# Altium PCB 2016-02-19_06-56-41.PcbDoc
Units mil, origin at the board's own origin, x right, y up, seen from the top; angles counter-clockwise.
Board outline 1950 x 2950 mil, 4 copper layers (Top Layer, MidLayer1, MidLayer2, Bottom Layer); 24 components, 14 nets, 57 pads, 106 vias.
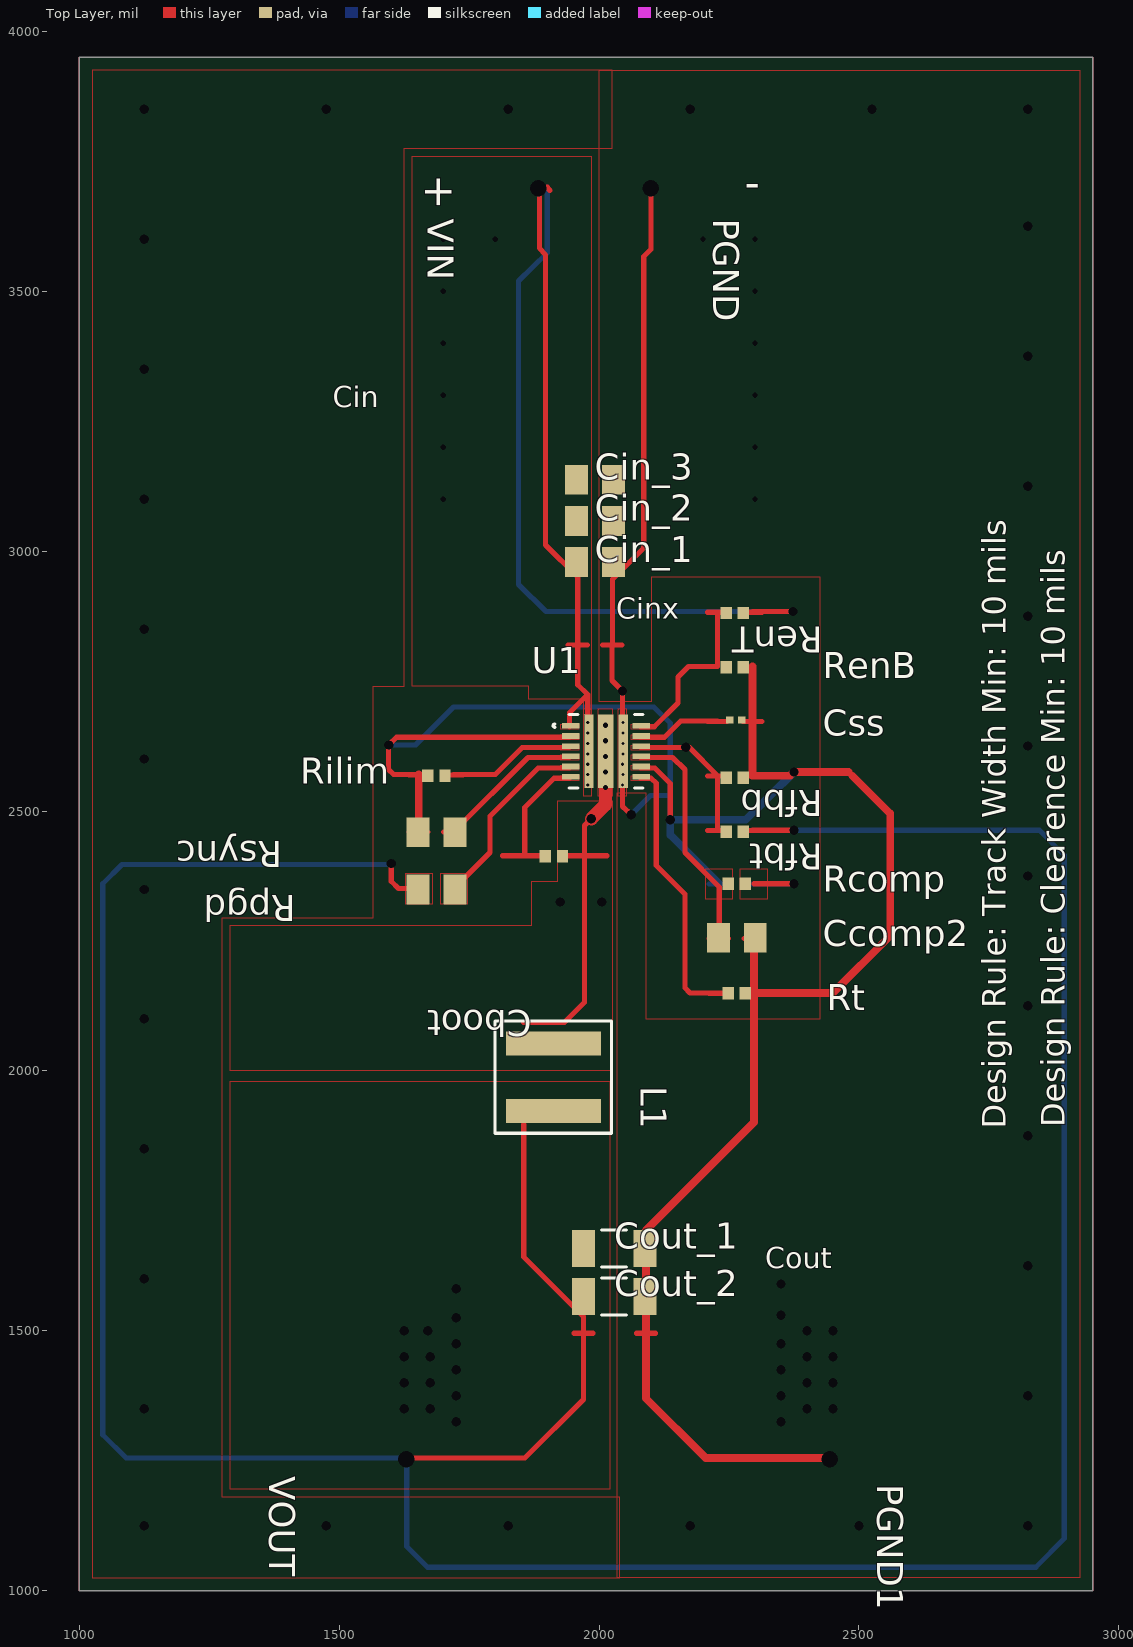
[diagram p0: Top Layer view]
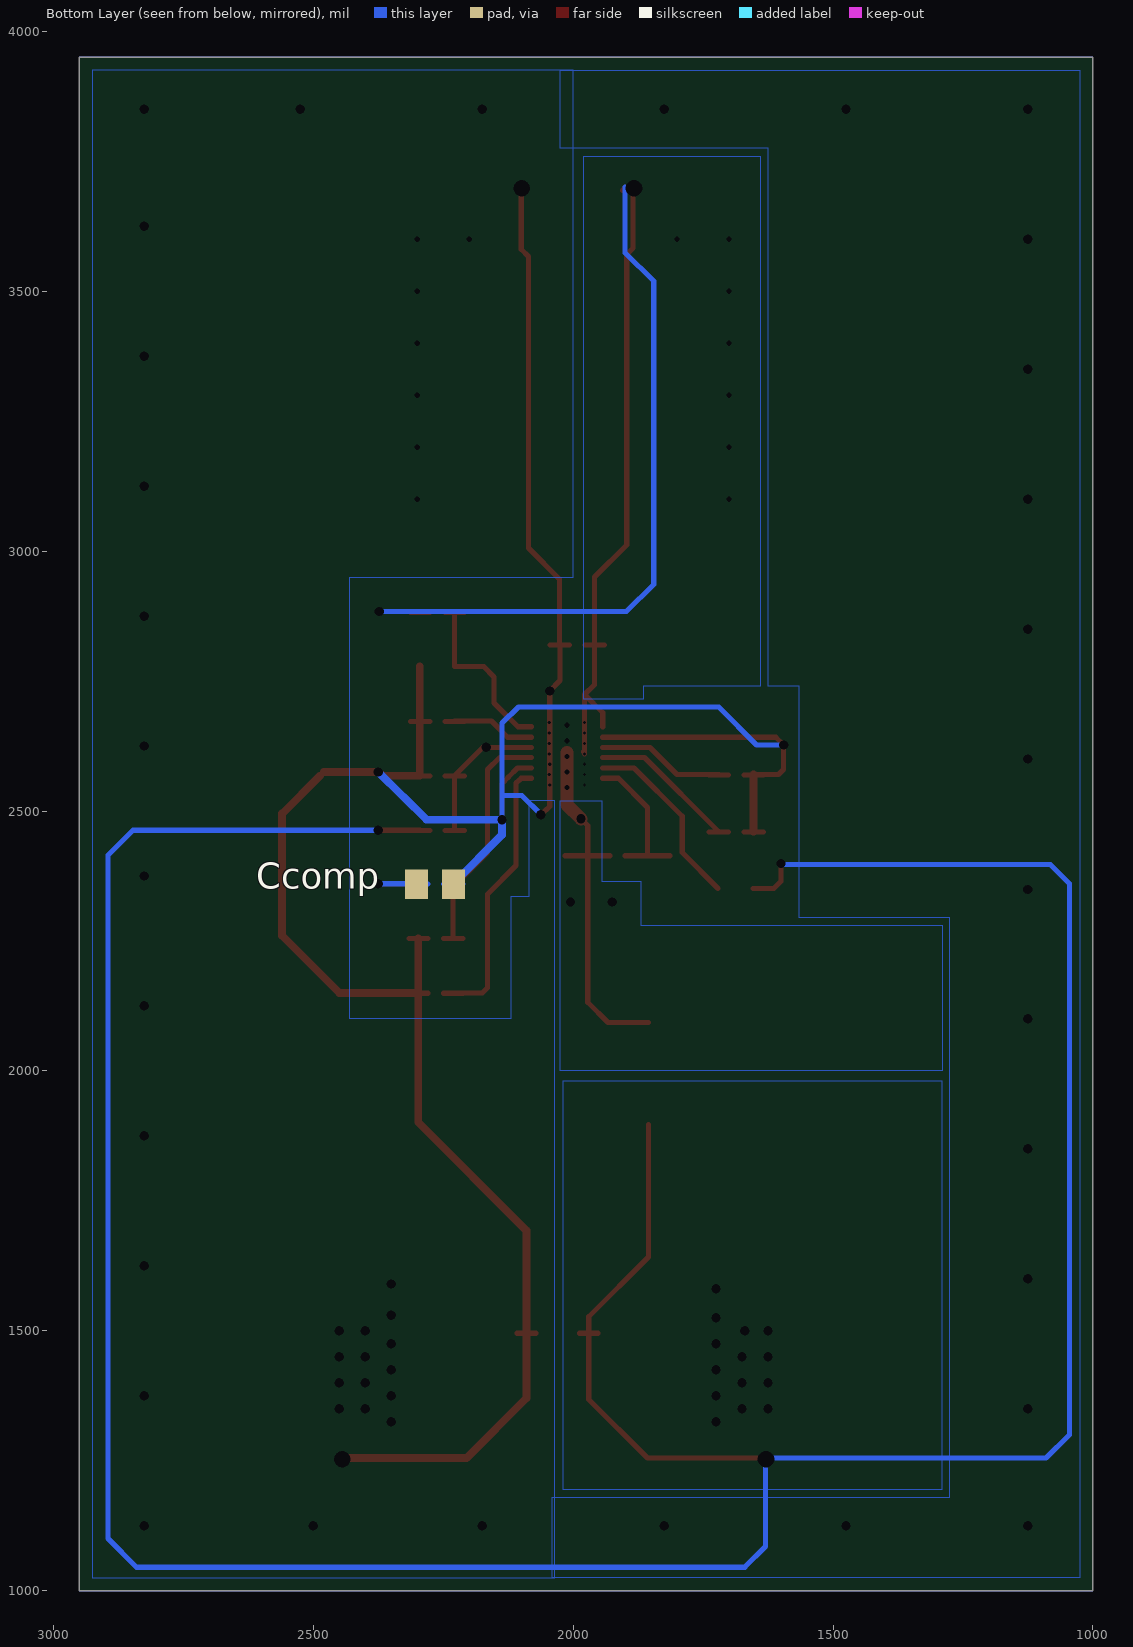
[diagram p1: Bottom Layer view, seen from below]

## Layer stack, top to bottom
Top Layer: signal copper 1.4
Dielectric: core 12.6, FR-4, Dk 4.8
MidLayer1: signal copper 1.4
Dielectric: prepreg 12.6, FR-4, Dk 4.8
MidLayer2: signal copper 1.4
Dielectric: core 12.6, FR-4, Dk 4.8
Bottom Layer: signal copper 1.4

## Board outline
1000,1000 2950,1000 2950,3950 1000,3950

## Design rules (kind name [scope] priority, off if disabled: settings)
PlaneConnect [All] p0: scope1count=1 scope1_0_kind=Board scope1_0_value=Board scope2count=1 scope2_0_kind=Board scope2_0_value=Board commentlength=0 planeconnectstyle=Direct reliefexpansion=20 reliefentries=4 reliefconductorwidth=10 reliefairgap=10
PlaneConnect [All] p1: planeconnectstyle=Direct reliefexpansion=20 reliefentries=4 reliefconductorwidth=10 reliefairgap=10
PolygonConnect [All] p0: scope1count=1 scope1_0_kind=Board scope1_0_value=Board scope2count=1 scope2_0_kind=Board scope2_0_value=Board commentlength=0 connectstyle=Direct reliefconductorwidth=10 reliefentries=4 polygonreliefangle="90 Angle"
PolygonConnect [All] p1: connectstyle=Direct reliefconductorwidth=10 reliefentries=4 polygonreliefangle="90 Angle"

## Components (designator, comment, footprint, x,y, rotation, side; value= is the part's Value field where it differs from the comment)
Cboot "" 0402 1913,2413 r180 top
Ccomp "" 0805#1 2266,2359 r0 bottom
Ccomp2 "" 0805#2 2265,2256 r0 top
Cin_1 "" 0805#2 1992,2979 r0 top
Cin_2 "" 0805#2 1992,3058 r0 top
Cin_3 "" 0805#2 1992,3137 r0 top
Cout_1 "" 1206_190 2029,1658 r0 top
Cout_2 "" 1206_190 2029,1566 r0 top
Css "" 0201 2263,2675 r0 top
L1 "" XAL5030 1912,1988 r270 top
PGND "" TP-1502 2099,3698 r270 top
PGND1 "" TP-1502 2444,1253 r270 top
Rcomp "" 0402 2265,2360 r0 top
RenB "" 0402 2261,2777 r0 top
RenT "" 0402 2261,2881 r180 top
Rfbb "" 0402 2261,2564 r180 top
Rfbt "" 0402 2261,2460 r180 top
Rilim "" 0402 1687,2568 r0 top
Rpgd "" 0805#2 1687,2349 r180 top
Rsync "" 0805#2 1687,2459 r180 top
Rt "" 0402 2265,2149 r0 top
U1 "" R-PVQFN-N15 2013,2615 r0 top
VIN "" TP-1502 1883,3698 r270 top
VOUT "" TP-1502 1629,1253 r270 top

## Footprints (in the part's own frame and the unit in brackets; to place one, negate y for a bottom-side part, rotate by r counter-clockwise, add the part's x,y. Pads: shape width x height; smd on the part's side, far side on the other; paste and mask are expansions set on the pad)
0201 [mil]
  rect 14x13 smd: 1(-11.5,0) 2(11.5,0)
0402 [mil]
  rect 22x24 smd: 1(-16.5,0) 2(16.5,0)
0805#1 [mil]
  rect 44x57 smd: 1(35.5,0) 2(-35.5,0)
0805#2 [mil]
  rect 44x57 smd: 1(-35.5,0) 2(35.5,0)
1206_190 [mil]
  rect 44x71 smd: 1(-59,0) 2(59,0)
  silkscreen extent -24,-36 24,36
R-PVQFN-N15 [mm]
  rect 0.85x0.28 smd: 1(-1.725,1.25) 2(-1.725,0.75) 3(-1.725,0.25) 4(-1.725,-0.25) 5(-1.725,-0.75) 6(-1.725,-1.25) 10(1.725,-1.25) 11(1.725,-0.75) 12(1.725,-0.25) 13(1.725,0.25) 14(1.725,0.75) 15(1.725,1.25)
  rect 0.45x3.6 smd: 7(-0.82,0) 9(0.85,0)
  rect 0.75x3.6 smd: 8(0,0)
  silkscreen extent -2.58,-1.8 1.8,1.8
TP-1502 [mil]
  round 0 hole 32: 1(0,0)
XAL5030 [mil]
  rect 46x183 smd: 1(-65,0) 2(65,0)
  silkscreen extent -108,-112 108,112

## Via types
v1: diameter 0, hole 18, Top Layer to Bottom Layer, 73 vias
v2: diameter 0, hole 10, Top Layer to Bottom Layer, 19 vias
v3: diameter 0, hole 6, Top Layer to Bottom Layer, 14 vias

## Nets (pads, with @x,y where several pads share a name; then routed paths per layer and width w, separated by ;. In a path a pad name is that pad's centre, name@x,y a point inside that pad or via, vN(x,y) a via of type N, cw(c..) or ccw(c..) an arc to the next point about the centre after c; other vN are vias at no path point)
0: Ccomp2.2 Ccomp.2 Cin_1.2 Cin_2.2 Cin_3.2 Cout_1.2 Cout_2.2 Css.2 PGND1.1 PGND.1 RenB.2 Rfbb.1 Rilim.1 Rsync.2 Rt.2 U1.2 U1.9 U1.11 | length 6014.4
  Top Layer w10: Rsync.2@1634,2459.5 Rsync.2@1671,2459.5 ; 1634,2569.5 Rilim.1@1671,2569.5 ; 1653,2570 1605,2570 1595,2580 v1(1595,2627) 1610,2642 U1.2@1943,2642 ; 2007,2819.5 2044,2819.5 ; v1(2062,2493) 2045,2509 v3(2045,2550) 2045,2610 2045,2613 v1(2045,2731) 2025,2751 2025,2818 2026,2820 2026,2946 2086,3006 2086,3272 2086,3567 2100,3581 2100,3700 ; 2072,1495 2108,1495 ; U1.11@2080,2583 2107,2583 2125,2565 2137,2553 v1(2137,2483) ; Rfbb.1@2276,2567.5 2313,2567.5 ; Css.2@2276,2672.5 2313,2672.5 ; Rt.2@2279,2149.5 2316,2149.5 ; Ccomp2.2@2279,2254.5 Ccomp2.2@2316,2254.5
  Top Layer w15: Rsync.2@1653,2460 1653,2570 ; 2295,2778 2295,2673 2295,2568 2367,2568 v1(2375,2575) 2480,2575 ; Ccomp2.2@2298,2255 2298,2150 ; 2445,1255 2205,1255 2090,1370 2090,1495 2090,1693 2298,1901 2298,2150 ; 2487,2568 2560,2495 2560,2260 2450,2150 2298,2150
  Bottom Layer w10: v1(1595,2627) 1647,2627 1720,2700 2105,2700 2137,2669 2137,2530 ; v1(2062,2493) 2099,2530 2137,2530 ; v1(2137,2483) 2137,2530 ; Ccomp.2@2212,2359.5 Ccomp.2@2249,2359.5
  Bottom Layer w15: Ccomp.2@2231,2360 2137,2454 v1(2137,2483) 2282,2483 v1(2375,2575)
  other v1: 1125,1125 1475,1125 1825,1125 2175,1125 2500,1125 2825,1125 2350,1325 1125,1350 2400,1350 2450,1350 2350,1375 2825,1375 2400,1400 2450,1400 2350,1425 2400,1450 2450,1450 2350,1475 2400,1500 2450,1500 2350,1530 2350,1590 1125,1600 2825,1625 1125,1850 2825,1875 1125,2100 2825,2125 1125,2349 2825,2375 1125,2600 2825,2625 1125,2850 2825,2875 1125,3100 2825,3125 1125,3350 2825,3375 1125,3600 2825,3625 1125,3850 1475,3850 1825,3850 2175,3850 2525,3850 2825,3850
  other v2: 2300,3100 2300,3200 2300,3300 2300,3400 2300,3500 2200,3600 2300,3600
  other v3: 2046,2570 2045,2590 2046,2610 2046,2630 2046,2650 2046,2670
1: Rilim.2 U1.3 | length 281.5
  Top Layer w10: Rilim.2@1701,2569.5 1738,2569.5 ; 1720,2570 1800,2570 1852,2622 U1.3@1943,2622
2: RenT.2 U1.15 | length 367.3
  Top Layer w10: U1.15@2080,2662 2106,2662 2152,2708 2152,2758 2172,2778 2228,2778 2228,2883 ; 2209,2882.5 RenT.2@2246,2882.5
3: Css.1 U1.14 | length 197.8
  Top Layer w10: U1.14@2080,2642 2126,2642 2157,2673 2228,2673 ; 2209,2672.5 Css.1@2246,2672.5
4: Cin_1.1 Cin_2.1 Cin_3.1 RenT.1 U1.1 U1.7 VIN.1 | length 2705.1
  Top Layer w10: 1885,3700 1885,3583 1897,3570 1897,3272 1897,3012 1959,2950 1959,2820 1959,2743 1978,2724 ; 1900,3700 1905,3694 ; 1940,2819.5 1977,2819.5 ; U1.1@1943,2662 1943,2689 1978,2724 ; v3(1978,2610) 1978,2612 U1.7@1978,2613 ; U1.7@1980,2614 U1.7@1978,2613 ; RenT.1@2276,2882.5 2313,2882.5 ; 2295,2884 v1(2373,2884) ; U1.7@1978,2613 v3(1978,2630) v3(1978,2650) v3(1978,2670) 1978,2724
  Bottom Layer w10: 1900,3700 1900,3574 1845,3520 1845,2936 1898,2884 v1(2373,2884) ; 2373,2885 2375,2885
  other v2: 1700,3100 1700,3200 1700,3300 1700,3400 1700,3500 1700,3600 1800,3600
  other v3: 1978,2550 1978,2570 1978,2590
5: Rt.1 U1.10 | length 557.4
  Top Layer w10: U1.10@2080,2563 2100,2563 2110,2554 2110,2395 2165,2340 2165,2160 2175,2150 2231,2150 ; 2212,2149.5 Rt.1@2249,2149.5
6: Cboot.1 L1.1 U1.8 | length 716.7
  Top Layer w10: 1855,2093 1933,2093 1972,2132 1972,2415 1972,2472 v1(1985,2485) ; Cboot.1@1929,2414 2015,2414
  Top Layer w25: v1(1985,2485) 2012,2512 U1.8@2012,2613
  other v1: 1925,2325 2005,2325
  other v2: 2012,2545 2012,2575 2012,2605 2012,2635 2012,2665
7: Ccomp2.1 Rcomp.1 U1.12 | length 483.6
  Top Layer w10: U1.12@2080,2603 2141,2603 2165,2580 2165,2420 2231,2354 Ccomp2.1@2231,2255 ; Ccomp2.1@2212,2254.5 Ccomp2.1@2249,2254.5
8: RenB.1 Rfbb.2 Rfbt.2 U1.13 | length 347.4
  Top Layer w10: U1.13@2080,2622 2164,2622 2167,2620 2170,2620 ; 2173,2623 2228,2568 2228,2463 ; 2209,2462.5 Rfbt.2@2246,2462.5 ; 2209,2567.5 Rfbb.2@2246,2567.5
  other v1: 2167,2623
9: Ccomp.1 Rcomp.2 | length 191
  Top Layer w10: 2298,2360 v1(2375,2360)
  Bottom Layer w10: 2279,2359.5 Ccomp.1@2316,2359.5 ; Ccomp.1@2298,2360 v1(2375,2360)
10: Cout_1.1 Cout_2.1 L1.2 Rfbt.1 Rpgd.2 VOUT.1 | length 6773.4
  Top Layer w10: v1(1600,2399) 1600,2398 1600,2365 1614,2351 Rpgd.2@1654,2351 ; 1630,1255 1857,1255 1970,1368 1970,1495 1970,1527 1855,1642 1855,1897 ; 1952,1495 1988,1495 ; Rfbt.1@2276,2462.5 2313,2462.5 ; 2295,2463 v1(2375,2463)
  Bottom Layer w10: 1600,2397 1082,2397 1045,2360 1045,1300 1090,1255 1630,1255 1630,1085 1670,1045 2840,1045 2895,1100 2895,2415 2847,2463 v1(2375,2463)
  other v1: 1725,1325 1625,1350 1675,1350 1725,1375 1625,1400 1675,1400 1725,1425 1625,1450 1675,1450 1725,1475 1625,1500 1670,1500 1725,1525 1725,1581
11: Cboot.2 U1.6 | length 287.2
  Top Layer w10: 1814,2414 Cboot.2@1900,2414 ; 1857,2415 1857,2507 1913,2563 U1.6@1943,2563
14: Rsync.1 U1.4 | length 319.2
  Top Layer w10: Rsync.1@1701,2459.5 Rsync.1@1738,2459.5 ; Rsync.1@1720,2460 1863,2603 U1.4@1943,2603
17: Rpgd.1 U1.5 | length 359.1
  Top Layer w10: Rpgd.1@1721,2351 1790,2420 1790,2490 1883,2583 U1.5@1943,2583

## Polygon pours and split planes (outlines as drawn)
7 on Top Layer " " (solid, pour order 0): 2205,2330 2205,2389 2256,2389 2256,2330
9 on Top Layer " " (solid, pour order 1): 2272,2330 2272,2389 2323,2389 2323,2330
10 on Top Layer " " (solid, pour order 2): 1628,2321 1628,2380 1679,2380 1679,2321
17 on Top Layer " " (solid, pour order 3): 1695,2321 1695,2380 1746,2380 1746,2321
2 on Top Layer " " (solid, pour order 4): 2062,2657 2062,2667 2097,2667 2097,2657
3 on Top Layer " " (solid, pour order 5): 2062,2637 2062,2647 2097,2647 2097,2637
8 on Top Layer " " (solid, pour order 6): 2062,2617 2062,2627 2097,2627 2097,2617
7 on Top Layer " " (solid, pour order 7): 2062,2598 2062,2608 2097,2608 2097,2598
5 on Top Layer " " (solid, pour order 8): 2062,2558 2062,2568 2097,2568 2097,2558
6 on Top Layer " " (solid, pour order 9): 1998,2528 1998,2697 2025,2697 2025,2528
4 on Top Layer " " (solid, pour order 10): 1970,2528 1970,2697 1985,2697 1985,2528
11 on Top Layer " " (solid, pour order 11): 1926,2558 1926,2568 1961,2568 1961,2558
17 on Top Layer " " (solid, pour order 12): 1926,2578 1926,2588 1961,2588 1961,2578
14 on Top Layer " " (solid, pour order 13): 1926,2598 1926,2608 1961,2608 1961,2598
1 on Top Layer " " (solid, pour order 14): 1926,2617 1926,2627 1961,2627 1961,2617
4 on Top Layer " " (solid, pour order 15): 1926,2657 1926,2667 1961,2667 1961,2657
4 on Top Layer " " (solid, pour order 18): 1985,3760 1985,2685 1970,2685 1970,2715 1865,2715 1865,2740 1640,2740 1640,3760
6 on Top Layer " " (solid, pour order 19): 2025,2520 2025,2000 1290,2000 1290,2280 1870,2280 1870,2365 1920,2365 1920,2520
10 on Top Layer " " (solid, pour order 20): 2020,1980 2020,1195 1290,1195 1290,1980
0 on Top Layer " " (solid, pour order 27): 2062,2578 2062,2588 2097,2588 2097,2578
0 on Top Layer " " (solid, pour order 28): 2037,2528 2037,2697 2052,2697 2052,2528
0 on Top Layer " " (solid, pour order 29): 1926,2637 1926,2647 1961,2647 1961,2637
0 on Top Layer " " (solid, pour order 32): 2925,3925 2925,1025 2035,1025 2035,2535 2090,2535 2090,2100 2425,2100 2425,2950 2100,2950 2100,2710 2000,2710 2000,3925
0 on Top Layer " " (solid, pour order 33): 1025,3925 1025,1025 2040,1025 2040,1180 1275,1180 1275,2295 1565,2295 1565,2740 1625,2740 1625,3775 2025,3775 2025,3925
4 on Bottom Layer " " (solid, pour order 21): 1640,3760 1640,2740 1865,2740 1865,2715 1980,2715 1980,3760
10 on Bottom Layer " " (solid, pour order 22): 2020,1980 2020,1195 1290,1195 1290,1980
6 on Bottom Layer " " (solid, pour order 23): 1945,2520 1945,2365 1870,2365 1870,2280 1290,2280 1290,2000 2025,2000 2025,2520
0 on Bottom Layer " " (solid, pour order 34): 2925,3925 2925,1025 2035,1025 2035,2520 2085,2520 2085,2335 2120,2335 2120,2100 2430,2100 2430,2950 2000,2950 2000,3925
0 on Bottom Layer " " (solid, pour order 35): 1025,3925 1025,1025 2040,1025 2040,1180 1275,1180 1275,2295 1565,2295 1565,2740 1625,2740 1625,3775 2025,3775 2025,3925
no net on Top Paste "Top Layer-No Net" (solid, remove dead copper): 2002.17,2681.93 2002.17,2618.94 2023.83,2618.94 2023.83,2681.93
no net on Top Paste "Top Layer-No Net" (solid, remove dead copper): 2002.17,2611.06 2002.17,2548.07 2023.83,2548.07 2023.83,2611.06
6 on MidLayer1 " " (solid, pour order 24): 1945,2520 1945,2365 1870,2365 1870,2285 1285,2285 1285,1995 2025,1995 2025,2520
10 on MidLayer1 " " (solid, pour order 25): 1285,1985 1285,1190 2025,1190 2025,1985
4 on MidLayer1 " " (solid, pour order 26): 1635,3765 1635,2740 1865,2740 1865,2655 1940,2655 1940,2710 1990,2710 1990,3765
0 on MidLayer2 " " (solid, pour order 31): 1025,3925 2925,3925 2925,1025 1025,1025
0 on MidLayer1 " " (solid, pour order 36): 2000,3925 2000,2700 1950,2700 1950,2645 2000,2645 2000,2530 2035,2530 2035,1025 2925,1025 2925,3925
0 on MidLayer1 " " (solid, pour order 37): 1025,3925 1025,1025 2040,1025 2040,1180 1275,1180 1275,2295 1860,2295 1860,2375 1935,2375 1935,2530 2000,2530 2000,2645 1950,2645 1855,2645 1855,2730 1625,2730 1625,3775 2000,3775 2000,3925

## Other copper
Multi-Layer:
  the board outline again, w1

## Silkscreen, mask and mechanical layers (free items; w line width, h text height)
Layer0:
  lines w10 net 0: 2057,3700 2143,3700
Top Overlay:
  text "+" at 1665,3725 h60 r270
  text "-" at 2280,3680 h60
  text "Cin" at 1487,3277 h40
  text "Cinx" at 2033,2870 h40
  text "Design Rule: Clearence Min: 10 mils" at 2896,1892 h45 r90
  text "Design Rule: Track Width Min: 10 mils" at 2782,1889 h45 r90
  text "Cout" at 2320,1620 h40